# EAGLE board Rear (EAGLE 6.3)
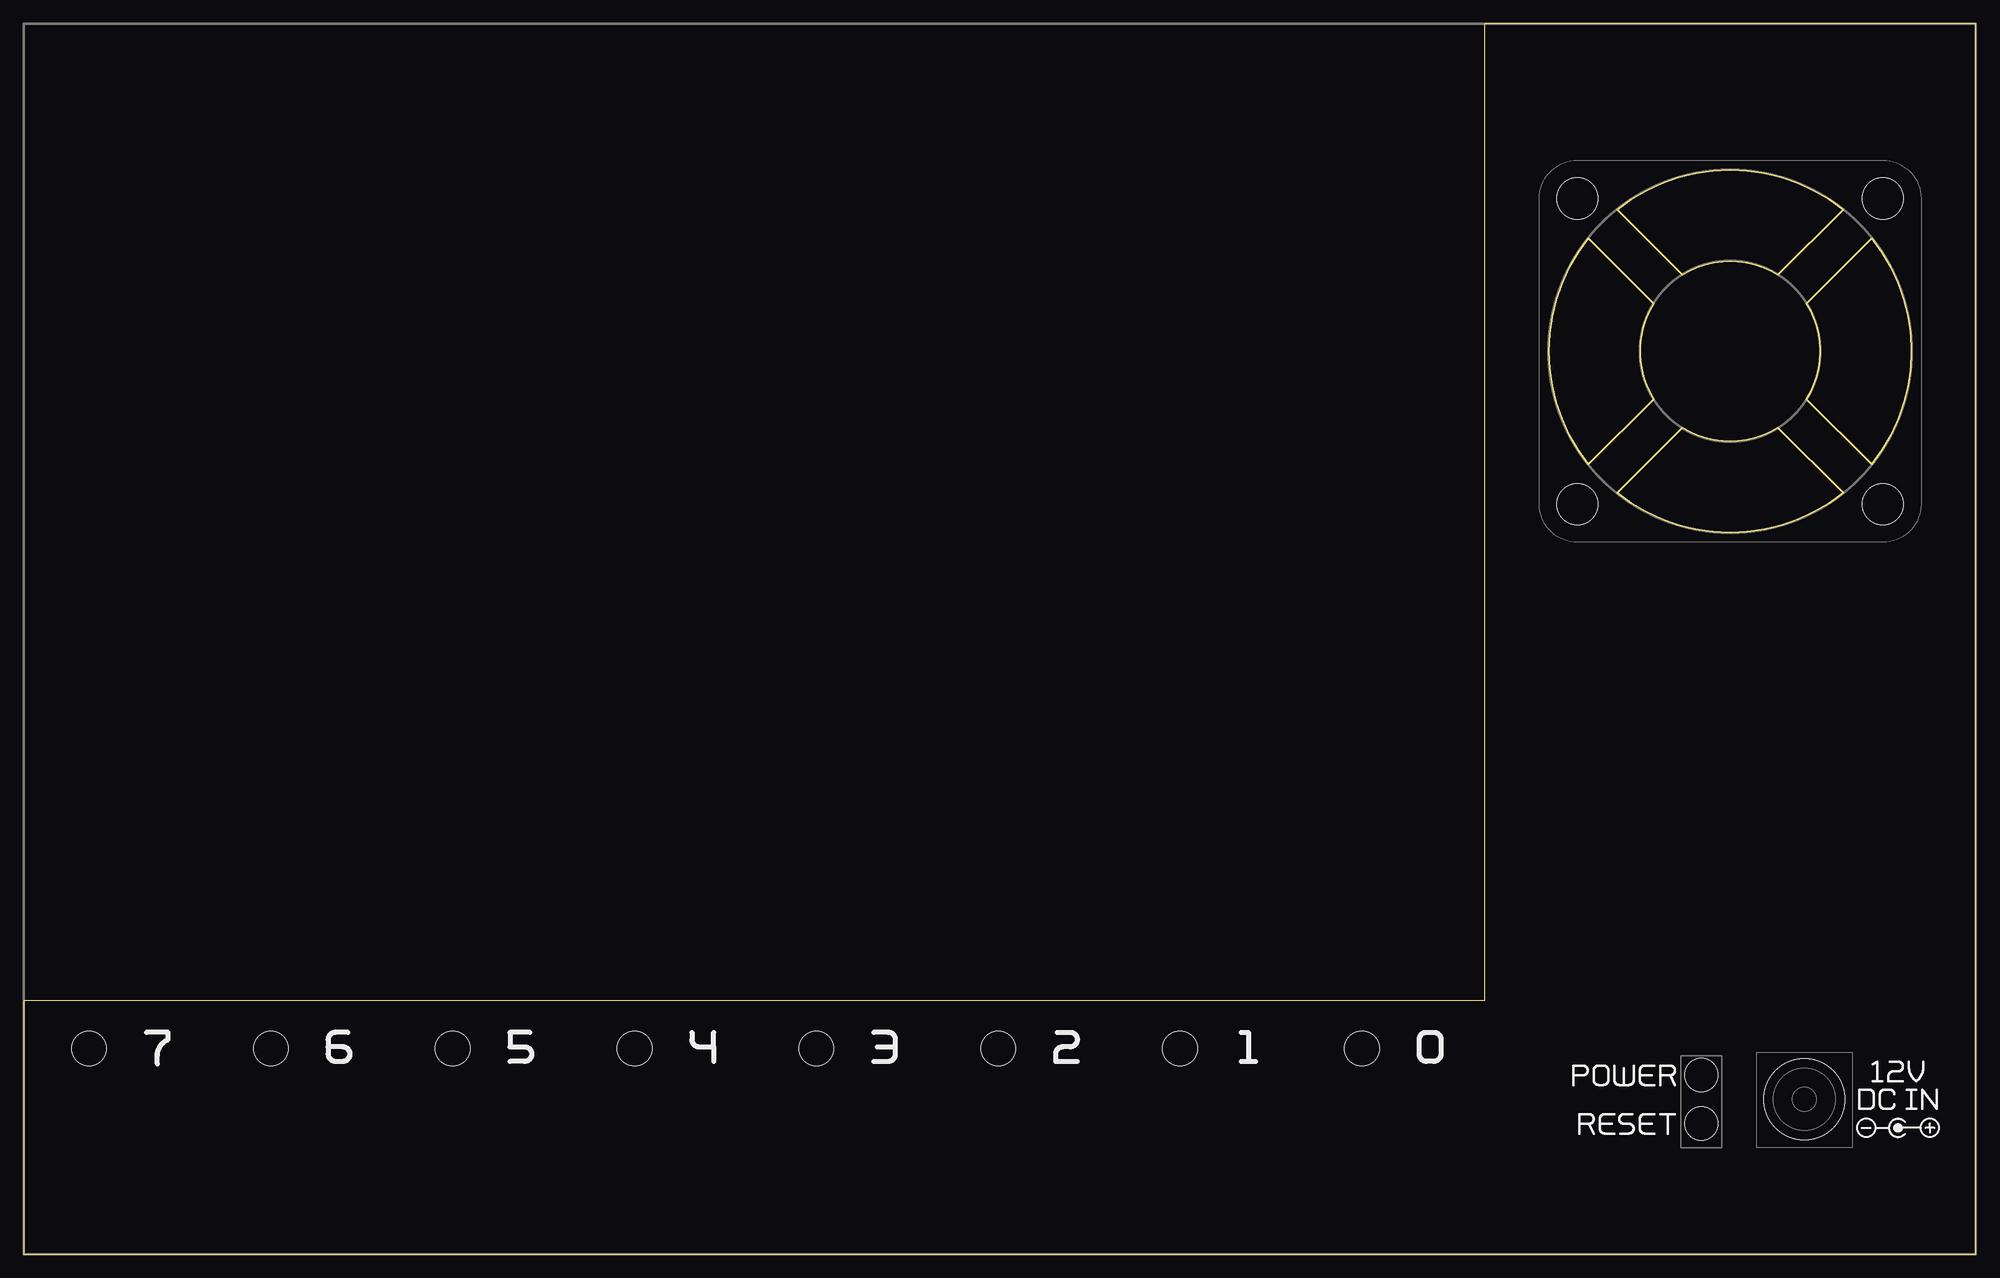
[diagram p0: board, top side]
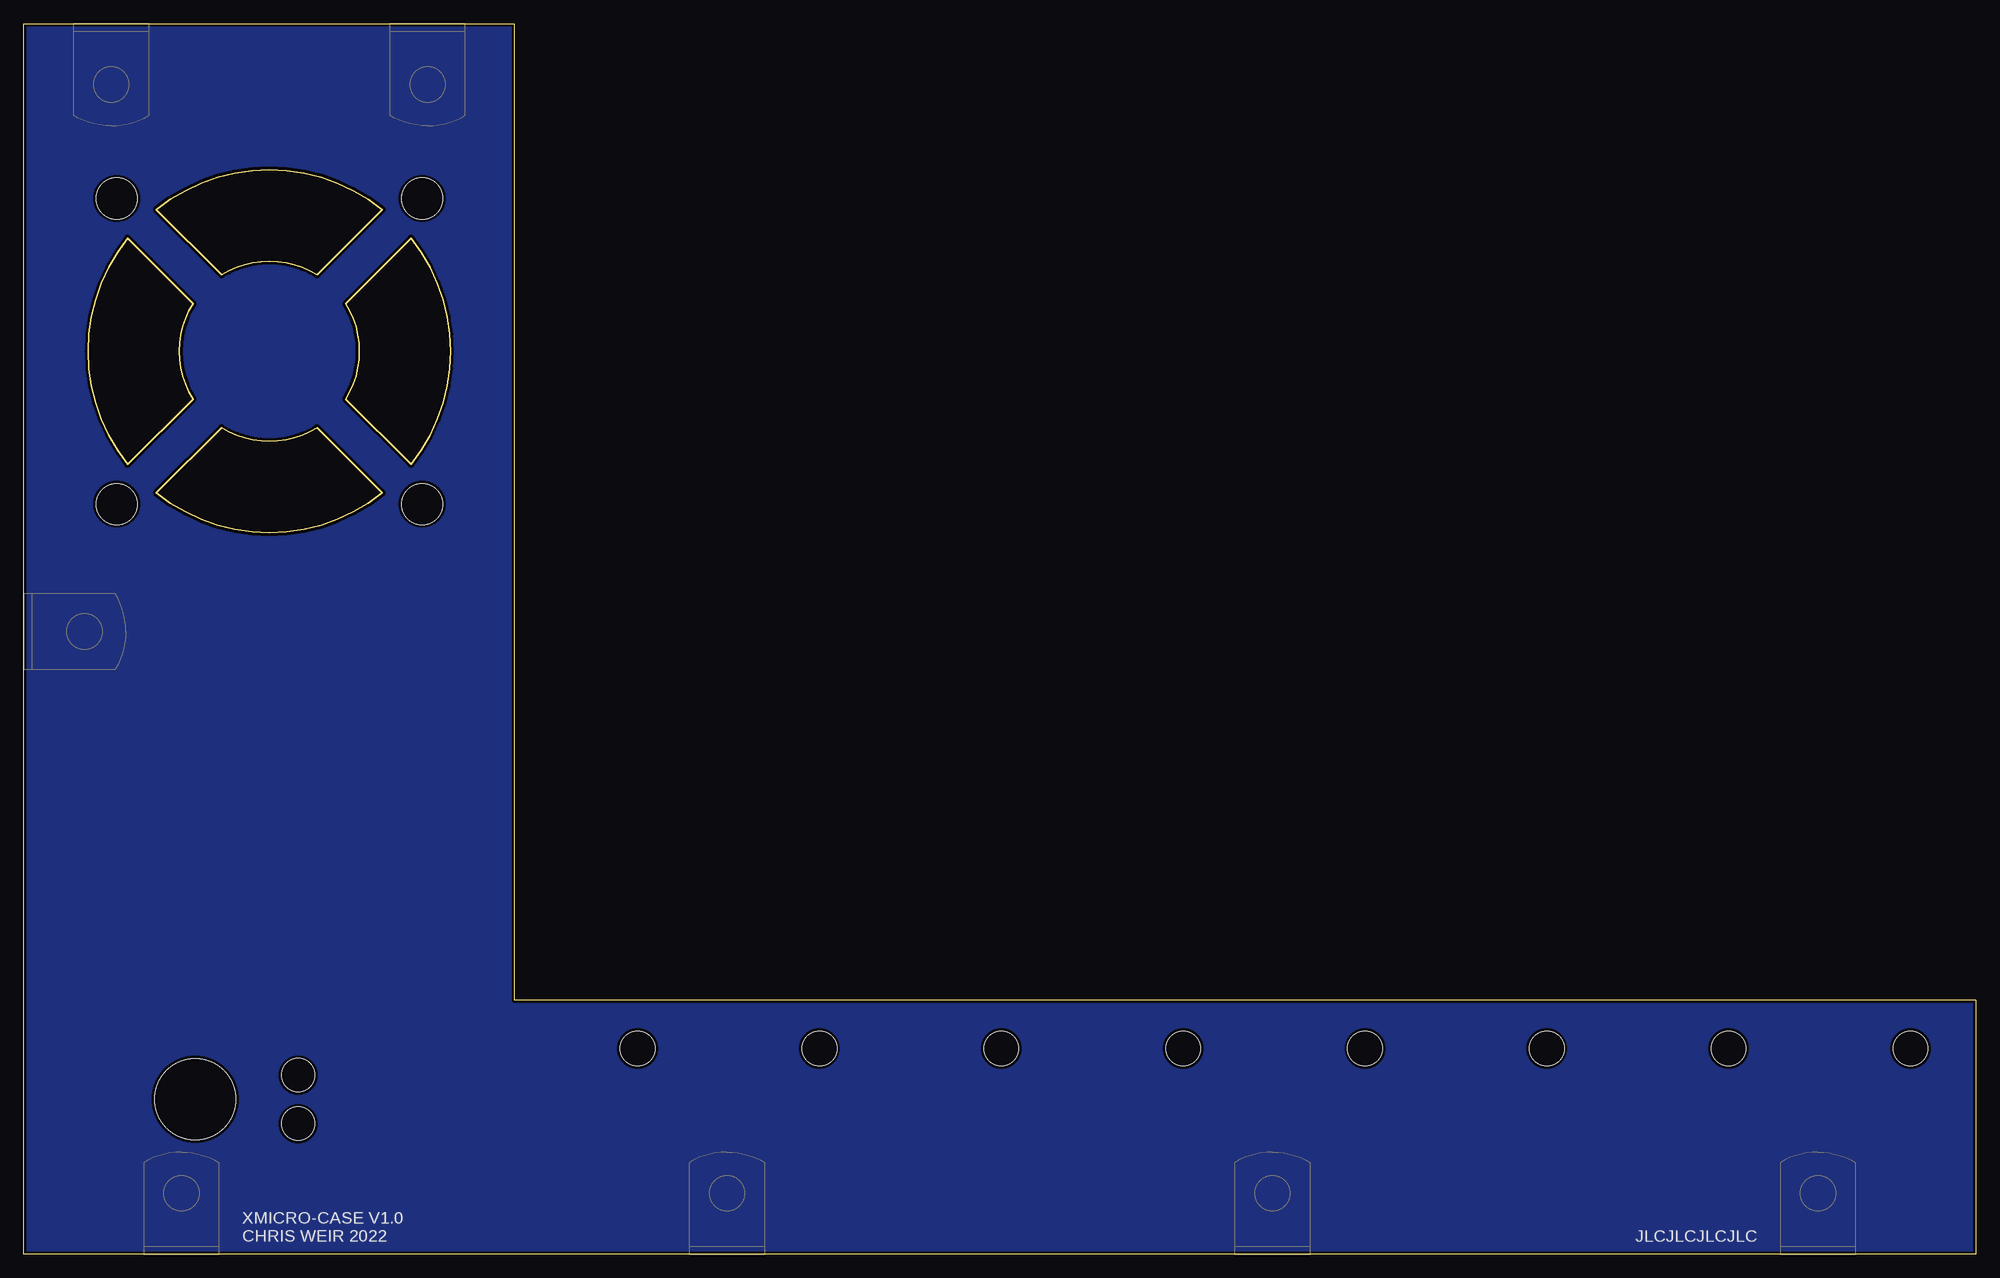
[diagram p1: board, bottom side, seen from below]

Size 204.47 x 128.84 mm. Coordinates in mm from the lower left corner, seen from the top.
Outline: 0,0 204.47,0 204.47,128.84 153.03,128.84 153.03,26.61 0,26.61 0,0
Copper layers (1*16): Top 0.035mm / dielectric 1.5mm / Bottom 0.035mm
Design rules "JLCPCB Custom": minimum track width 5mil, minimum drill 0.3mm, track to track 5mil, track to pad 8mil, pad to pad 8mil, via to via 8mil, smd to smd 5mil, copper to edge 0.3mm, drill to drill 0.3mm, minimum pad ring 10mil, minimum via ring 8mil, stop-mask expansion 0mil, vias tented up to drill 25mil, thermal gap 10mil
Holes 3.65 mm at 140.18,21.53 121.13,21.53 102.08,21.53 83.03,21.53 63.98,21.53 44.93,21.53 25.88,21.53 6.83,21.53

## Footprints (pad centres in the part's own frame; a part is rotated, then mirrored left to right if it is on the bottom)
FAN-40MM = hole 4.3: -16,16; 16,16; 16,-16; -16,-16
PJ-082BH = hole 8.5: 0,5.1
553-*F = hole 3.5: 0,2.54; 0,7.62

## Placement (x,y rotation side)
E$2  [FAN-40MM]  178.75,94.55 0 top
E$3  [PJ-082BH]  186.53,11.11 0 top
E$4  [553-*F]  175.74,11.11 0 top
E$9  [614-HN]  16.51,0 0 bottom
E$10  [614-HN]  187.96,0 0 bottom
E$11  [614-HN]  73.66,0 0 bottom
E$12  [614-HN]  130.81,0 0 bottom
E$14  [614-HN]  204.47,65.21 270 bottom
E$15  [614-HN]  162.18,128.84 180 bottom
E$16  [614-HN]  195.33,128.84 180 bottom

## Library data of the parts
E$2-E$4 E$9-E$12 E$14-E$16 = panel

## Tracks (layer width: path | path; a pad name or v marks a point on that pad's centre or on a via)
S$81
  pour Bottom: 204.47,128.84 204.47,0 0,0 0,26.61 153.03,26.61 153.03,128.84

## Text on the board
bPlace: JLCJLCJLCJLC | XMICRO-CASE V1.0 / CHRIS WEIR 2022